# Altium PCB PCB1.PcbDoc
Units mm, origin at the board's own origin, x right, y up, seen from the top; angles counter-clockwise.
Board outline 68.1 x 57.9 mm, 2 copper layers (Top Layer, Bottom Layer); 88 components, 62 nets, 316 pads, 94 vias.
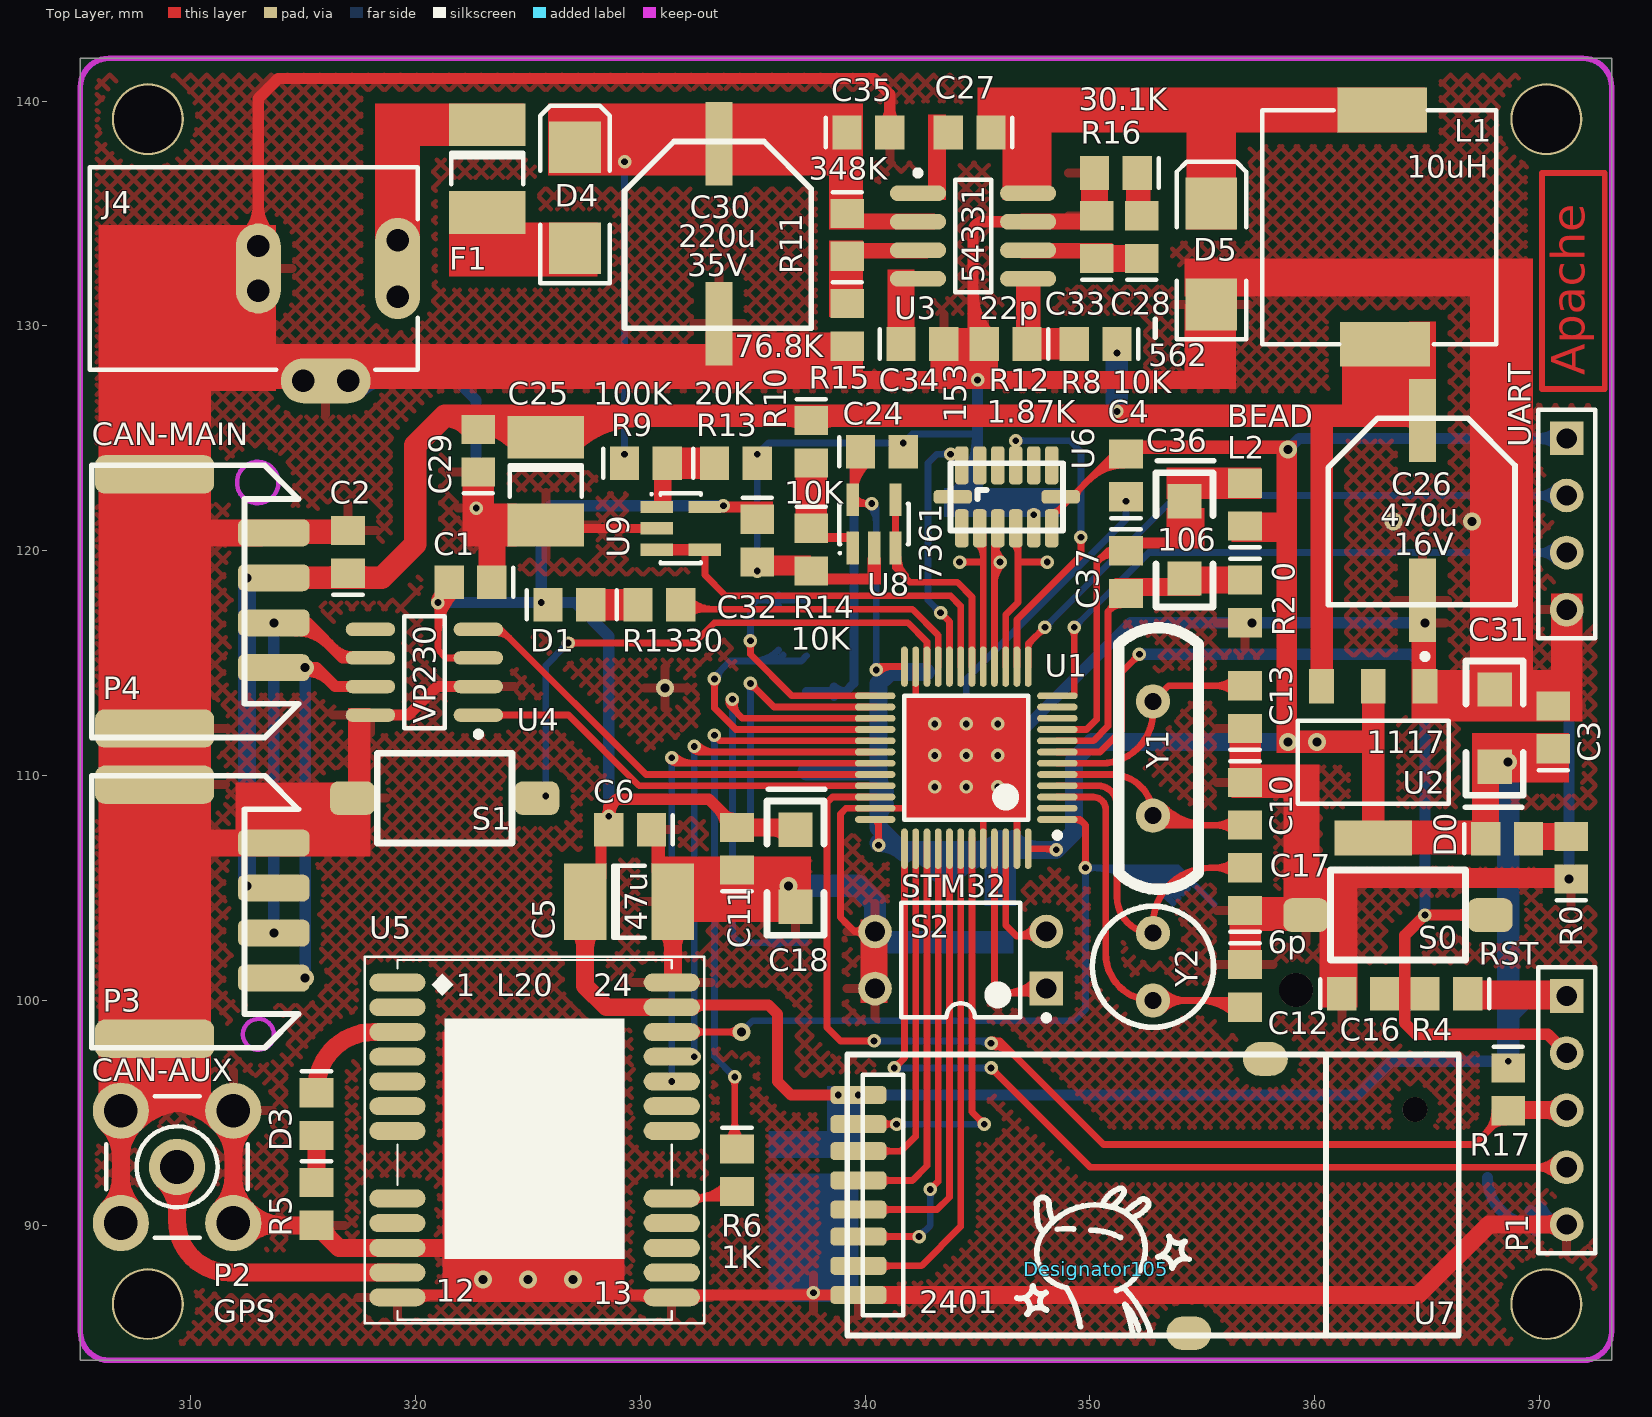
[diagram p0: Top Layer view]
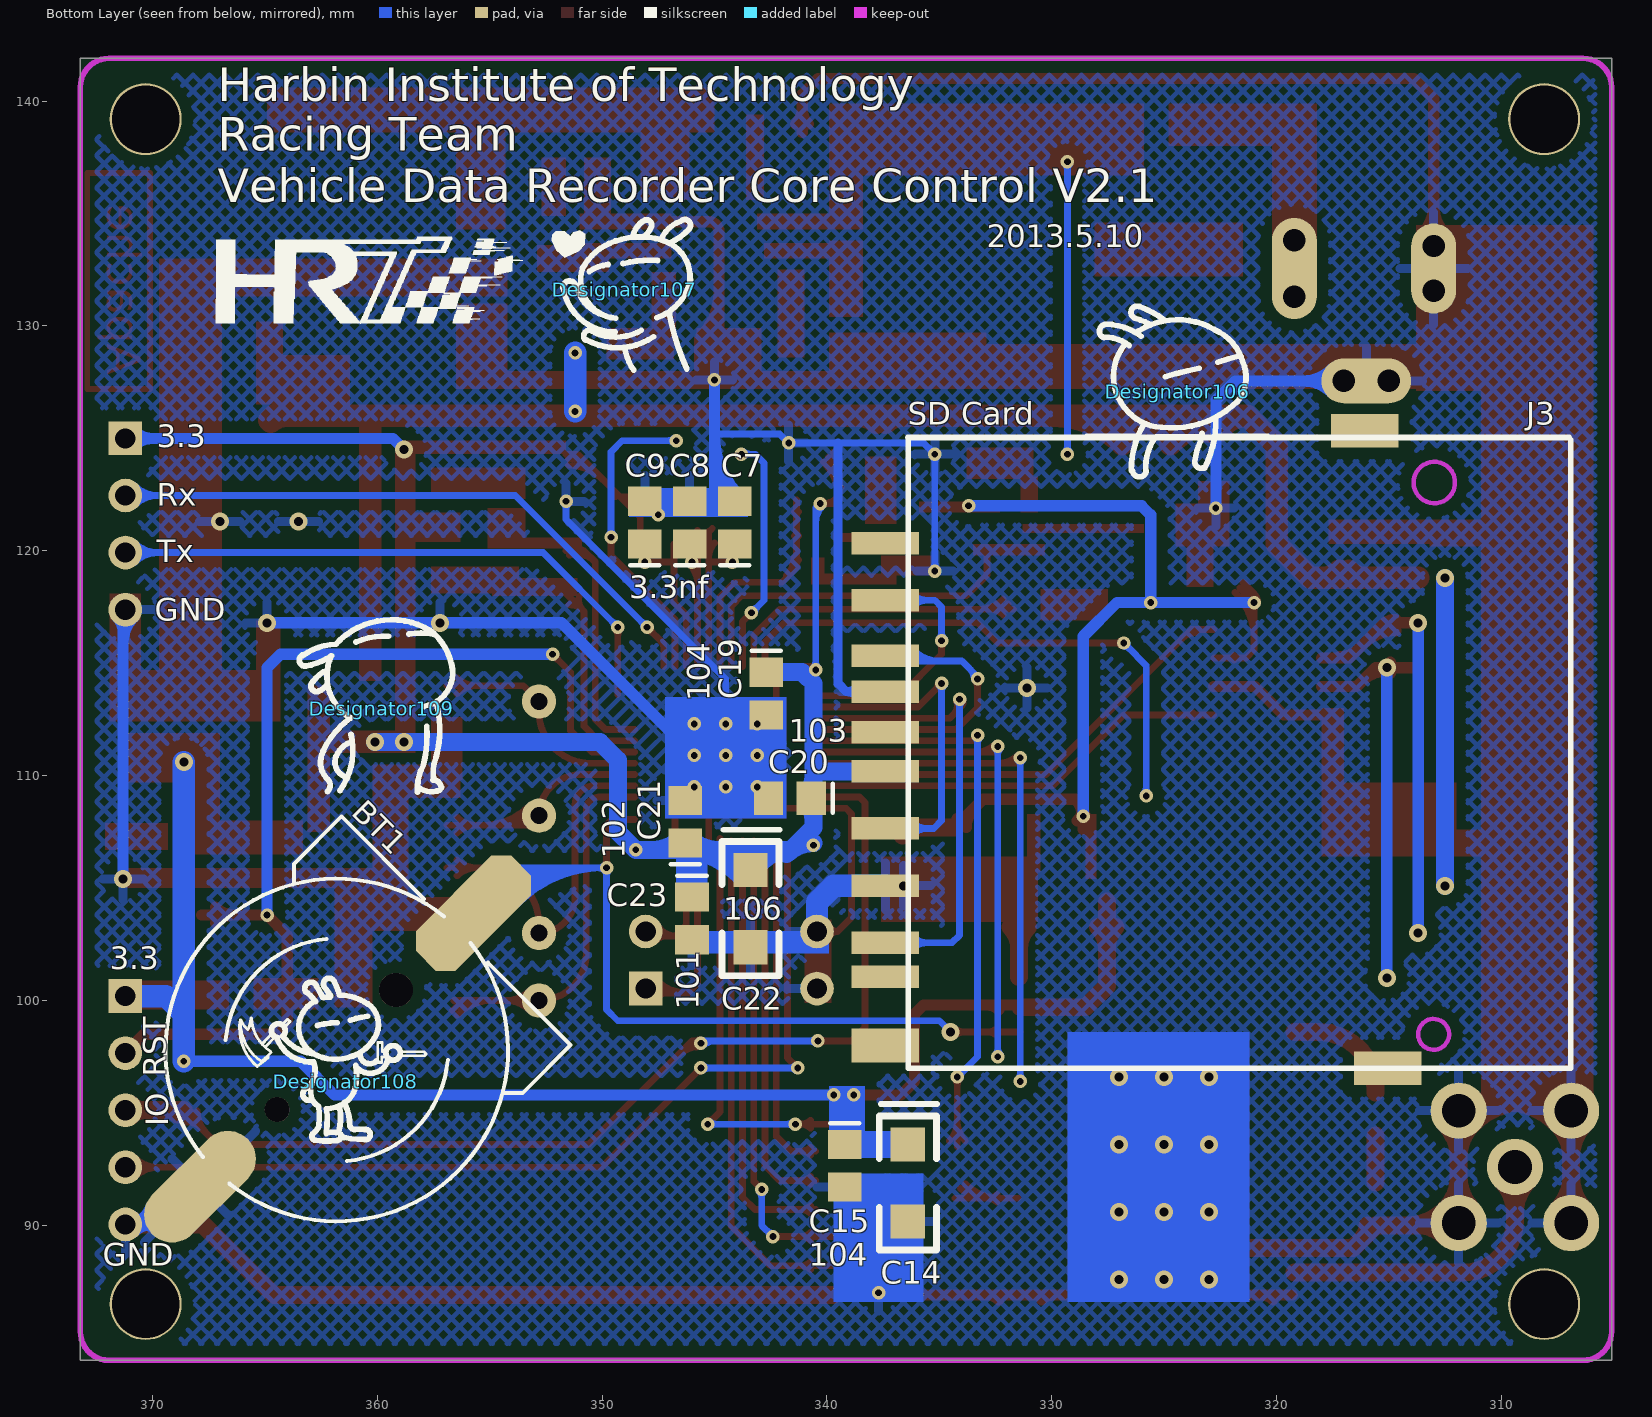
[diagram p1: Bottom Layer view, seen from below]

## Layer stack, top to bottom
Top Layer: signal copper 0.0356
Dielectric: dielectric 0.32, FR-4, Dk 4.8
Bottom Layer: signal copper 0.0356

## Board outline
305.1,141.9 373.2,141.9 373.2,84 305.1,84

## Design rules (kind name [scope] priority, off if disabled: settings)
Clearance Clearance_1 [(InPolygon)] p1: gap=0.5
Clearance [All] p2: gap=0.2
PolygonConnect [All] p1: connectstyle=Relief reliefconductorwidth=0.4 reliefentries=4 polygonreliefangle="90 Angle"
RoutingVias [All] p1: holewidth=0.711 width=1.27 viastyle="Through Hole" minholewidth=0.711 minwidth=1.27 maxholewidth=0.711 maxwidth=1.27
SilkscreenOverComponentPads [All] p1: minsilkscreentomaskgap=0.254
SolderMaskExpansion [All] p1: expansion=0.102
Width [All] p1: maxlimit=2 minlimit=0.254 preferedwidth=0.4
27 further rules are at their usual default settings.

## Classes and differential pairs
component class Sheet1: BT1 C1 C2 C3 C4 C5 C6 C7 C8 C9 C10 C11 C12 C13 C14 C15 C16 C17 C18 C19 C20 C21 C22 C23 C24 C25 C26 C27 C28 C29 C30 C31 C32 C33 C34 C35 C36 C37 D0 D1 D3 D4 D5 F1 J3 J4 L1 L2 P1 P2 P3 P4 R0 R1 R2 R4 R5 R6 R8 R9 R10 R11 R12 R13 R14 R15 R16 R17 S0 S1 S2 U1 U2 U3 U4 U5 U6 U7 U8 U9 UART Y1 Y2

## Components (designator, comment, footprint, x,y, rotation, side; value= is the part's Value field where it differs from the comment)
BT1 "Battery" LI1220_1 361.8,97.8 r225 bottom
C1 "Cap" C0805 323.4,118.6 r180 top
C2 "Cap" C0805 317,119 r90 top
C3 "Cap" C0805 370.6,111.2 r90 top
C4 "Cap" C0805 351.6,122.4 r90 top
C5 "Cap Pol2" 1812 329.5,104.4 r0 top
C6 "Cap" C0805 330.5,107.6 r180 top
C7 "Cap" C0805 344.1,120.3 r90 bottom
C8 "Cap" C0805 346.1,120.3 r90 bottom
C9 "Cap" C0805 348.1,120.3 r90 bottom
C10 "Cap" C0805 356.9,109.7 r270 top
C11 "Cap" C0805 334.3,105.8 r90 top
C12 "Cap" C0805 356.9,101.6 r270 top
C13 "Cap" C0805 356.9,112.1 r90 top
C14 "Cap Pol2" 1206 336.4,93.6 r270 bottom
C15 "Cap" C0805 339.2,93.6 r270 bottom
C16 "Cap" C0805 361.2,100.3 r0 top
C17 "Cap" C0805 356.9,104 r90 top
C18 "Cap Pol2" 1206 336.9,107.6 r270 top
C19 "Cap" C0805 342.7,114.6 r270 bottom
C20 "Cap" C0805 340.7,109 r0 bottom
C21 "Cap" C0805 346.3,107 r90 bottom
C22 "Cap Pol2" 1206 343.4,105.8 r270 bottom
C23 "Cap" C0805 346,104.6 r270 bottom
C24 "Cap" C0805 339.8,124.4 r0 top
C25 "Cap Pol2" 1812 325.8,123.1 r270 top
C26 "Cap Pol2" Cap8*8 364.8,125.2 r0 top
C27 "Cap" C0805 345.6,138.6 r180 top
C28 "Cap" C0805 352.3,133 r90 top
C29 "Cap" C0805 322.8,123.5 r90 top
C30 "Cap Pol1" Cap8*8 333.5,137.5 r0 top
C31 "Cap Pol2" 1206 368,110.4 r90 top
C32 "Cap" C0805 335.2,121.4 r270 top
C33 "Cap" C0805 350.3,133 r90 top
C34 "Cap" C0805 341.6,129.2 r0 top
C35 "Cap" C0805 339.2,138.6 r0 top
C36 "Cap Pol2" 1206 354.2,122.2 r270 top
C37 "Cap" C0805 351.6,120 r270 top
D0 "LED2" C0805 367.6,107.2 r0 top
D1 "LED2" C0805 325.9,117.6 r0 top
D3 "LED2" C0805 315.6,95.9 r270 top
D4 "Diode 1N4007" SMB 327.1,135.7 r90 top
D5 "B340A" SMB 355.4,133.2 r90 top
Designator105 "Comment" TUSIJI_14 350.287,88.064 r0 top
Designator106 "Comment" TUSIJI_3 324.4,127.102 r180 bottom
Designator107 "Comment" TUSIJI_8 348.985,131.638 r180 bottom
Designator108 "Comment" TUSIJI_23 361.4,96.4 r180 bottom
Designator109 "Comment" TUSIJI_16 359.8,113 r180 bottom
F1 "Fuse 1" 1812 323.2,137 r270 top
J3 "SD" SD_LOCK 337.4,117.8 r270 bottom locked
J4 "PWR2.5" KLD-0202 305.512,132.556 r0 top
L1 "Inductor Iron" l 363,139.6 r270 top
L2 "Inductor" C0805 356.9,121.1 r90 top
P1 "Jlink" HDR1X5 371.2,100.2 r270 top
P2 "SMB" SMB_V-RJ45 309.4,92.6 r0 top
P3 "Header 4" DuraClik*4 305.6,100 r270 top
P4 "Header 4" DuraClik*4 305.6,113.8 r270 top
R0 "Res2" C0805 371.4,105.4 r90 top
R1 "Res2" C0805 329.9,117.6 r0 top
R2 "Res2" C0805 356.9,118.7 r270 top
R4 "Res2" C0805 366.8,100.3 r180 top
R5 "Res2" C0805 315.6,91.9 r270 top
R6 "Res2" C0805 334.3,93.4 r270 top
R8 "Res2" C0805 351.2,129.2 r180 top
R9 "Res2" C0805 329.3,123.9 r0 top
R10 "Res2" C0805 337.6,125.8 r270 top
R11 "Res2" C0805 339.2,135 r270 top
R12 "Res2" C0805 347.2,129.2 r180 top
R13 "Res2" C0805 333.3,123.9 r0 top
R14 "Res2" C0805 337.6,121 r270 top
R15 "Res2" C0805 339.2,131 r270 top
R16 "Res2" C0805 352.1,136.8 r180 top
R17 "Res2" C0805 368.6,97 r270 top
S0 "SW-PB" button_SMD 359.6,103.8 r0 top
S1 "SW-PB" button_SMD 317.2,109 r0 top
S2 "SW DIP-2" DIP-4 344.25,101.8 r180 top
U1 "STM32F103C8T6" LQFP48_N 344.5,110.8 r180 top
U2 "REG1117-3.3" ZZ311 362.6,110.6 r180 top
U3 "TPS54331" SOIC8_M 344.8,134 r0 top
U4 "VP230" SOP8_N 320.4,114.6 r180 top
U5 "L20" L20 325.3,93.8 r0 top
U6 "MMA7361" "MMA7361 - duplicate" 343.8,120.9 r90 top
U7 "nRF24L01" "NRF24L01 PA" 339.2,97.6 r0 top
U8 "TLV2211" SOT-23-5 340.4,121.2 r0 top
U9 "TLV2211" SOT-23-5 331.8,121 r270 top
UART "Header 4" HDR1X4 371.2,125 r270 top
Y1 "8M" XTAL 352.8,113.3 r270 top
Y2 "32.768K" XTAL32 352.8,103 r270 top

## Footprints (in the part's own frame and the unit in brackets; to place one, negate y for a bottom-side part, rotate by r counter-clockwise, add the part's x,y. Pads: shape width x height; smd on the part's side, far side on the other; paste and mask are expansions set on the pad)
1206 [mil]
  rect 60x60 smd: 1(0,0) 2(135,0)
  silkscreen extent -71,-50 185,51
1812 [mm]
  rect 1.9x3.4 smd: 1(-1.95,0) 2(1.95,0)
  silkscreen extent -0.7,-1.6 0.7,1.6
button_SMD [mm]
  rrect50% 2x1.5 smd: 1(0,0) 2(8.2,0)
  silkscreen extent 1.1,-2 7.1,2
C0805 [mm]
  rect 1.3x1.5 smd: 1(0,0) 2(1.9,0)
  silkscreen extent -0.95,-0.65 -0.95,0.65
Cap8*8 [mm]
  rect 1.2x3.7 smd: 1(0,0.6) 2(0,-7.4)
  silkscreen extent -4.2,-7.6 4.1,0.7
DIP-4 [mm] "DIP; 4 Leads; Row Spacing 7.62 mm; Pitch 2.54 mm"
  rect 1.5x1.5 hole 0.9: 1(-3.81,1.27)
  round 1.5 hole 0.9: 2(-3.81,-1.27) 3(3.81,-1.27) 4(3.81,1.27)
  silkscreen extent -3.94,-2.55 2.65,2.69, body extent -3.15,-2.5 3.15,2.5, height 5.6
DuraClik*4 [mm]
  rrect50% 1.7x5.3 smd: 0(-9.6,2.8) 0(1.7,2.8)
  rrect50% 1.2x3.2 smd: 1(-7,8.1) 2(-5,8.1) 3(-3,8.1) 4(-1,8.1)
  silkscreen extent -10,0 2.1,9.2
HDR1X4 [mm] "Connector; Header; 4 Position"
  rect 1.5x1.5 hole 0.9: 1(0,0)
  round 1.5 hole 0.9: 2(2.54,0) 3(5.08,0) 4(7.62,0)
  silkscreen extent -1.27,-1.27 8.89,1.27
HDR1X5 [mm] "Connector; Header; 5 Position"
  rect 1.5x1.5 hole 0.9: 1(0,0)
  round 1.5 hole 0.9: 2(2.54,0) 3(5.08,0) 4(7.62,0) 5(10.16,0)
  silkscreen extent -1.27,-1.27 11.43,1.27
KLD-0202 [mm] "DC Power Jack, 2.5mm, KLD Series, PCB Mount"
  oval 2x4.5 all layers, no hole: 1(13.7,0)
  round 1.5 hole 1: 1A(13.7,-1.25) 1B(13.7,1.25) 2A(7.5,-1) 2B(7.5,1) 3A(9.5,-5) 3B(11.5,-5)
  oval 2x4 all layers, no hole: 2(7.5,0)
  oval 4x2 all layers, no hole: 3(10.5,-5)
  silkscreen extent 0,-4.5 14.6,4.5
l [mm]
  rect 2x4 smd: 1(0,0) 2(10.414,0.127)
  silkscreen extent 0,-5.33 10.41,5.08
L20 [mm]
  oval 2.5x0.8 smd: 1(-6.1,7) 2(-6.1,5.9) 3(-6.1,4.8) 4(-6.1,3.7) 5(-6.1,2.6) 6(-6.1,1.5) 7(-6.1,0.4) 8(-6.1,-2.6) 9(-6.1,-3.7) 10(-6.1,-4.8) 11(-6.1,-5.9) 12(-6.1,-7) 13(6.1,-7) 14(6.1,-5.9) 15(6.1,-4.8) 16(6.1,-3.7) 17(6.1,-2.6) 18(6.1,0.4) 19(6.1,1.5) 20(6.1,2.6) 21(6.1,3.7) 22(6.1,4.8) 23(6.1,5.9) 24(6.1,7)
  silkscreen extent -7.55,-8.15 7.55,8.15
LI1220_1 [mm]
  round 1.5 hole 1.5 unplated: 0(-0.025,3.75)
  round 1.1 hole 1.1 unplated: 0(0,-3.75)
  oct 2.5x6 smd: 1(0,8.6)
  oval 2.5x6 smd: 2(0,-8.6)
  silkscreen extent -7.62,-7.57 7.62,7.57
LQFP48_N [mm] "Thin QFP, 48-Leads, Body 7x7mm, Pitch 0.5mm, IPC Medium Density"
  oval 1.8x0.3 smd: 1(-4.05,2.75) 2(-4.05,2.25) 3(-4.05,1.75) 4(-4.05,1.25) 5(-4.05,0.75) 6(-4.05,0.25) 7(-4.05,-0.25) 8(-4.05,-0.75) 9(-4.05,-1.25) 10(-4.05,-1.75) 11(-4.05,-2.25) 12(-4.05,-2.75) 25(4.05,-2.75) 26(4.05,-2.25) 27(4.05,-1.75) 28(4.05,-1.25) 29(4.05,-0.75) 30(4.05,-0.25) 31(4.05,0.25) 32(4.05,0.75) 33(4.05,1.25) 34(4.05,1.75) 35(4.05,2.25) 36(4.05,2.75)
  oval 0.3x1.8 smd: 13(-2.75,-4.05) 14(-2.25,-4.05) 15(-1.75,-4.05) 16(-1.25,-4.05) 17(-0.75,-4.05) 18(-0.25,-4.05) 19(0.25,-4.05) 20(0.75,-4.05) 21(1.25,-4.05) 22(1.75,-4.05) 23(2.25,-4.05) 24(2.75,-4.05) 37(2.75,4.05) 38(2.25,4.05) 39(1.75,4.05) 40(1.25,4.05) 41(0.75,4.05) 42(0.25,4.05) 43(-0.25,4.05) 44(-0.75,4.05) 45(-1.25,4.05) 46(-1.75,4.05) 47(-2.25,4.05) 48(-2.75,4.05)
  silkscreen extent -4.18,-2.75 2.75,3.57, body extent -3.5,-3.5 3.5,3.5, height 1.6
"MMA7361 - duplicate" [mm]
  rrect50% 1.7x0.6 smd: 1(0.1,-0.5) 2(0.1,-1.3) 3(0.1,-2.1) 4(0.1,-2.9) 5(0.1,-3.7) 6(0.1,-4.5) 8(2.9,-4.5) 9(2.9,-3.7) 10(2.9,-2.9) 11(2.9,-2.1) 12(2.9,-1.3) 13(2.9,-0.5)
  rrect50% 0.6x1.7 smd: 7(1.5,-4.9) 14(1.5,-0.1)
  silkscreen extent 0,-5 3,0
"NRF24L01 PA" [mm]
  oval 2x1.5 smd: 0(18.6,-0.2) 1(15.2,-12.4)
  rrect50% 2.5x0.8 smd: 1(0.5,-1.8) 2(0.5,-3.1) 3(0.5,-4.3) 4(0.5,-5.6) 5(0.5,-6.9) 6(0.5,-8.1) 7(0.5,-9.4) 8(0.5,-10.7)
  silkscreen extent 0,-12.5 27.2,0
SD_LOCK [mm]
  rect 1x3 smd: 1(0,0) 2(2.464,0.001) 3(4.064,0) 4(7.608,0.001) 5(10.148,0.001) 6(12.688,0.001) 7(15.228,0.001) 8(16.752,0.001) 9(-2.54,0) 11(5.864,0.001)
  rect 1.5x3 smd: 10(-7.536,21.316) 10(19.8,0.001) 10(20.816,22.353)
  Keep-Out Layer circle w0.2: c19.304,24.384 r0.687
  Keep-Out Layer circle w0.2: c-5.236,24.416 r0.922
  silkscreen extent -7.24,1 20.82,30.48
SMB [mm] "DO-214-AA/SMB; 2 C-Bend Leads; Body 5.3 x 3.6 mm, inc. leads (LxW)"
  rect 2.3x2.3 smd: 1(-2.25,0) 2(2.25,0)
  silkscreen extent -3.8,-1.55 4.1,1.55
SMB_V-RJ45 [mm] "Connector; SMB Straight"
  round 2.5 hole 1.5: 1(0,0) 2(-2.5,-2.5) 2(-2.5,2.5) 2(2.5,-2.5) 2(2.5,2.5)
  silkscreen extent -3.15,-3.15 3.15,3.15
SOIC8_M [mm]
  oval 2.5x0.7 smd: 1(-2.45,1.905) 2(-2.45,0.635) 3(-2.45,-0.635) 4(-2.45,-1.905) 5(2.45,-1.905) 6(2.45,-0.635) 7(2.45,0.635) 8(2.45,1.905)
  silkscreen extent -2.57,-2.5 0.8,2.93, body extent -2,-2.5 2,2.5, height 1.75
SOP8_N [mm] "SOIC, 8-Leads, Body 4.9x3.9mm, Pitch 1.27mm, IPC Medium Density"
  oval 2.2x0.6 smd: 1(-2.4,1.905) 2(-2.4,0.635) 3(-2.4,-0.635) 4(-2.4,-1.905) 5(2.4,-1.905) 6(2.4,-0.635) 7(2.4,0.635) 8(2.4,1.905)
  silkscreen extent -2.53,-2.5 0.9,2.88, body extent -2,-2.5 2,2.5, height 1.75
SOT-23-5 [mm] "SOT-23/SC-74A; 5 Leads; Body 3 x 3.1 mm, inc. leads (LxW max)"
  rect 0.55x1.45 smd: 1(-0.95,-1.075) 2(0,-1.075) 3(0.95,-1.075) 4(0.95,1.075) 5(-0.95,1.075)
  silkscreen extent -1.57,-1.35 1.55,0.9
TUSIJI_3 [mm] "TSJ"
  silkscreen extent -4.04,-3.81 4.01,3.78
TUSIJI_8 [mm] "TSJ"
  silkscreen extent -3.25,-3.61 2.92,3.1
TUSIJI_14 [mm] "TSJ"
  silkscreen extent -3.53,-2.77 4.11,3.59
TUSIJI_16 [mm] "TSJ"
  silkscreen extent -3.66,-3.73 3.16,3.93
TUSIJI_23 [mm] "TSJ"
  silkscreen extent -4.72,-2.65 3.58,4.59
XTAL [mil]
  round 60 hole 30: 1(200,0) 2(0,0)
  silkscreen extent -129,-60 329,80
XTAL32 [mil]
  round 60 hole 30: 1(0,0) 2(118.11,0)
  silkscreen extent -47,-106 165,106
ZZ311 [mm] "SOT-223/SC-73; 4 Leads; Body 6.7 x 7.3 mm, inc. leads (LxW max)"
  rect 1.1x1.55 smd: 1(-2.3,-3.375) 2(0,-3.375) 3(2.3,-3.375)
  rect 3.45x1.55 smd: 4(0,3.375)
  silkscreen extent -3.35,-4.82 3.35,1.85

## Part data
BT1: "Multicell Battery"
C1 C2 C3 C4 C6 C7 C8 C9 C10 C11 C12 C13 C15 C16 C17 C19 C20 C21 C23 C24 C27 C28 C29 C32 C33 C34 C35 C37: "Capacitor"
C5 C14 C18 C22 C25 C26 C31 C36: "Polarized Capacitor (Axial)"
C30: "Polarized Capacitor (Radial)"
D0 D1 D3: "Typical RED, GREEN, YELLOW, AMBER GaAs LED"
D4: "1 Amp General Purpose Rectifier"
D5: library part "Diode 11DQ03", "Schottky Rectifier"
F1: "Fuse"
J3: "Full-size SD Memory Card"
J4: "Low Voltage Power Supply Connector"
L1: "Magnetic-Core Inductor"
P1: library part "Header 5", "Header, 5-Pin"
P2: "SMB Straight Connector"
P3 P4 UART: "Header, 4-Pin"
R0 R1 R2 R4 R5 R6 R8 R9 R10 R11 R12 R13 R14 R15 R16 R17: "Resistor"
S0 S1: "Switch"
S2: "DIP Switch, 2 Position, SPST"
U1: "STM32 ARM-based 32-bit MCU with 64 Kbytes Flash, 48-pin LQFP, Industrial Temperature"
U2: "800mA and 1A Low Dropout Positive Regulator 2.85V, 3.3V, 5V, and Adjustable"
U3: "3A,28VINPUT, STEPDOWNSWIFT?DC/DCCONVERTERWITHECO-MODE?"
U4: "3.3-VCANTRANSCEIVERS"
U7: "nRF24L01+PA+LNA"
Y1 Y2: library part XTAL, "Crystal Oscillator"

## Free pads (board coordinates)
  round 3.2 hole 3: 0(370.3,139.2) 1(370.3,86.5) 2(308.1,86.5) 3(308.1,139.2)

## Via types
v1: diameter 0.6, hole 0.3, Top Layer to Bottom Layer, 64 vias
v2: diameter 0.8, hole 0.4, Top Layer to Bottom Layer, 30 vias

## Nets (pads, with @x,y where several pads share a name; then routed paths per layer and width w, separated by ;. In a path a pad name is that pad's centre, name@x,y a point inside that pad or via, vN(x,y) a via of type N, cw(c..) or ccw(c..) an arc to the next point about the centre after c; other vN are vias at no path point)
ADC12_IN5: C9.1 U1.15 U6.4 | length 8.1
  Top Layer w0.3: U1.15 346.25,117.15 346.8,117.7 U6.4@346.8,120.3 ; U6.4@346.594,120.344 cw(c346.096,119.846) 346.8,119.846 ; 346.8,119.5 v1(348.1,119.5) ; v1@347.994,119.394 ccw(c347.738,119.138) 347.738,119.5 ccw(c347.738,119.862) v1@347.994,119.606
ADC12_IN6: C8.1 U1.16 U6.3 | length 9.4
  Top Layer w0.3: U1.16 U6.3@345.75,120.9 ; 345.75,118.534 cw(c346.966,118.534) v1@346.106,119.394 ; 345.75,119.259 cw(c346.241,119.259) v1@345.894,119.606 ; 345.75,119.726 cw(c346.624,119.726) U6.3@346.006,120.344 ; 345.75,119.741 ccw(c346.241,119.741) v1@345.894,119.394 ; U6.3@345.75,120.466 ccw(c346.966,120.466) v1@346.106,119.606
  other v1: 346,119.5
ADC12_IN7: C7.1 U1.17 U6.2 | length 8.3
  Top Layer w0.3: v1(344.2,119.5) 345.25,119.5 ; v1@344.306,119.394 cw(c344.562,119.138) 344.562,119.5 cw(c344.562,119.862) v1@344.306,119.606 ; U6.2@344.994,120.344 cw(c344.376,119.726) 345.25,119.726 ; U6.2 345.25,120.85 345.25,119.5 ; U1.17@345.25,115.1 345.25,119.5
ADC12_IN8: U1.18 U8.3 U8.4 | length 12.8
  Top Layer w0.3: U8.3@341.262,120.663 ccw(c341.048,120.877) 341.35,120.877 ccw(c341.652,120.877) U8.3@341.438,120.663 ; U8.4@341.262,121.737 cw(c341.048,121.523) 341.35,121.523 cw(c341.652,121.523) U8.4@341.438,121.737 ; U8.4 341.35,119.25 342,118.6 344.1,118.6 344.75,117.95 U1.18 ; U8.3@341.475,119.675 ccw(c342.561,119.675) 341.793,118.907 ; 341.35,119.373 cw(c341.652,119.373) 341.438,119.587 ccw(c341.652,119.373) 341.35,119.373 ; 341.35,119.373 ccw(c341.048,119.373) 341.262,119.587 cw(c341.048,119.373) 341.35,119.373
ADC12_IN9: U1.19 U9.3 U9.4 | length 16.2
  Top Layer w0.3: U9.4@332.787,119.962 cw(c332.573,119.748) 332.875,119.748 cw(c333.177,119.748) U9.4@332.963,119.962 ; U9.4 332.875,118.925 333.8,118 343.8,118 344.25,117.55 U1.19
ADC_5V: R10.2 R14.1 U8.1
ADC_12V: R9.2 R13.1 U9.1
ADDRESS1: S2.2 U1.46 | length 8.1
  Top Layer w0.3: U1.46@346.25,107.2 346.25,103.35 346.73,102.87 ; 347.094,102.87 cw(c347.094,102.104) S2.2@347.636,102.646 ; 347.229,102.87 ccw(c347.229,103.511) S2.2@347.795,103.211 ; S2.2@347.53,103.351 cw(c346.73,103.775) 346.73,102.87 ; S2.2@348.06,102.87 346.73,102.87
ADDRESS2: S2.1 U1.45 | length 12.3
  Top Layer w0.3: U1.45@345.75,107.3 345.75,100.75 346.17,100.33 ; 346.879,100.33 ccw(c346.879,101.675) S2.1@347.845,100.739 ; 347.094,100.33 cw(c347.094,99.564) S2.1@347.636,100.106 ; S2.1@347.629,100.948 cw(c346.17,102.362) 346.17,100.33 ; S2.1@348.06,100.33 346.17,100.33
AGND: C36.2 C37.2 R2.1 U1.8 | length 10.1
  Top Layer w0.3: U1.8 350.15,111.55 350.8,112.2 350.8,117.3 C37.2 ; C37.2@351.017,117.971 cw(c350.395,117.805) 350.85,117.35 cw(c351.455,116.745) C37.2@351.484,117.6
CAN_H: P3.4 P4.4 U4.7 | length 21
  Top Layer w0.5: P4.4 v2(315.1,114.8) 315.6,114.8 316.435,113.965 U4.7 ; P4.4@314.947,114.552 cw(c315.545,113.955) 315.545,114.8 cw(c315.545,115.645) P4.4@314.947,115.047 ; P4.4@315.1,114.65 cw(c315.1,113.081) 316.21,114.19
  Bottom Layer w0.5: v2(315.1,101) v2(315.1,114.8)
CAN_L: P3.3 P4.3 U4.6 | length 21.9
  Top Layer w0.5: v2(313.7,116.8) 315.2,116.8 316.765,115.235 U4.6 ; P4.3@314.7,116.45 cw(c314.7,114.398) 316.151,115.849 ; P4.3@314.7,116.95 cw(c314.7,116.105) P4.3@315.297,116.703 ; 316.372,115.628 ccw(c317.2,116.456) U4.6@317.2,115.285
  Bottom Layer w0.5: v2(313.7,103) v2(313.7,116.8)
G_SELECT: U1.14 U6.10 | length 15.6
  Top Layer w0.3: U1.14 346.75,116.943 349.6,119.793 v1(349.6,120.6) ; v1@349.494,120.494 cw(c349.238,120.238) 349.6,120.238 cw(c349.962,120.238) v1@349.706,120.494
  Bottom Layer w0.3: v1@346.7,124.8 v1(346.7,124.9) 349.1,124.9 349.6,124.4 v1(349.6,120.6) ; v1@346.806,124.794 cw(c347.062,124.538) 347.062,124.9 cw(c347.062,125.262) v1@346.806,125.006 ; v1@349.494,120.706 ccw(c349.238,120.962) 349.6,120.962 ccw(c349.962,120.962) v1@349.706,120.706
GND: BT1.2 C1.1 C2.2 C3.2 C4.1 C5.2 C6.1 C7.2 C8.2 C9.2 C10.1 C11.1 C12.1 C13.1 C14.2 C15.2 C16.1 C17.1 C18.2 C19.2 C20.2 C21.2 C22.2 C23.2 C24.2 C25.2 C26.2 C29.1 C30.2 C31.2 C32.2 C33.2 C34.2 C35.2 D5.1 J3.3 J3.6 J4.2 J4.2A J4.2B J4.3 J4.3A J4.3B P1.5 P2.2 P3.0 P3.1 P4.0 P4.1 R0.1 R2.2 R5.2 R12.2 R13.2 R14.2 R15.2 R16.2 S0.1 S1.1 S2.3 S2.4 U1.23 U1.35 U1.44 U1.47 U2.1 U3.7 U4.2 U4.8 U5.10 U5.12 U5.13 U5.24 U6.5 U7.8 U8.2 U9.2 UART.4 | length 309.1
  Top Layer w0.3: S2.3@339.889,102.834 ccw(c339.53,102.68) 339.53,103.07 ; S2.3@339.889,103.306 cw(c339.53,103.46) 339.53,103.07 ; S2.3 339.53,103.07 ; 342.25,113.15 U1.23 ; 342.85,108.55 U1.35 339.15,108.55 338.9,108.3 338.9,103.7 339.53,103.07 ; U1.44 345.25,108.95 ; U1.47 346.75,108.45
  Top Layer w0.5: J4.2@312.482,134.086 ccw(c311.201,135.367) 313.012,135.367 ccw(c314.823,135.367) J4.2@313.542,134.086 ; J4.2@312.658,133.91 ccw(c311.805,134.763) 313.012,134.763 ccw(c314.219,134.763) J4.2@313.366,133.91 ; J4.2B 313.012,140.112 313.9,141 340.4,141 341.1,140.3 C35.2 ; U4.8 319.695,112.695 320.965,113.965 U4.2 ; U5.12@319.3,86.9 U7.8 ; U5.12@320.156,86.694 cw(c320.654,86.196) 320.654,86.9 ; 329.946,86.9 cw(c329.946,86.196) U5.13@330.444,86.694 ; U5.13@332.356,86.694 cw(c332.854,86.196) 332.854,86.9 ; 337.338,86.9 ccw(c337.338,87.362) v1@337.665,87.035 ; v1@337.735,87.035 ccw(c338.062,87.362) 338.062,86.9 ; C35.2@340.817,138.983 ccw(c340.134,139.666) 341.1,139.666 ccw(c342.066,139.666) C35.2@341.383,138.983 ; 344.8,130.266 ccw(c346.266,130.266) R12.2@345.229,129.229 ; 344.8,131.473 ccw(c347.473,131.473) R12.2@345.583,129.583 ; R12.2 344.8,129.7 344.8,134.2 cw(c345.235,134.2) 345.235,134.635 U3.7
  Top Layer w0.8: P2.2@306.299,90.701 ccw(c304.848,92.152) 306.9,92.152 ccw(c308.952,92.152) P2.2@307.501,90.701 ; P2.2@306.299,94.499 cw(c304.848,93.048) 306.9,93.048 cw(c308.952,93.048) 307.501,94.499 cw(c309.918,92.082) 309.918,95.5 ; P2.2@306.7,90.5 306.9,90.7 306.9,95.5 311.9,95.5 311.9,90.3 312.2,90 R5.2 316.6,89 U5.10 321.9,89 ; 308.882,95.5 cw(c308.882,92.082) 311.299,94.499 cw(c309.848,93.048) 311.9,93.048 cw(c313.952,93.048) P2.2@312.501,94.499 ; P2.2@311.299,90.701 ccw(c309.848,92.152) 311.9,92.152 ccw(c313.952,92.152) 312.501,90.701 ccw(c314.194,92.394) 314.194,90 ; P2.2@312.501,89.499 cw(c313.711,88.289) 313.711,90 ; R5.2@315.95,90 ccw(c316.795,90) R5.2@316.197,89.403 ; C5.2@331.061,103.261 cw(c330.122,102.322) 331.45,102.322 cw(c332.778,102.322) C5.2@331.839,103.261 ; U5.24@331.45,101.05 C5.2 ; U7.8 364.6,86.9 367.74,90.04 P1.5 ; P1.5@370.953,89.793 ccw(c370.355,89.195) 370.355,90.04 ccw(c370.355,90.885) P1.5@370.953,90.287
  Bottom Layer w0.3: v1@335.094,119.206 ccw(c334.838,119.462) 335.2,119.462 ccw(c335.562,119.462) v1@335.306,119.206 ; v1@335.094,124.194 cw(c334.838,123.938) 335.2,123.938 cw(c335.562,123.938) v1@335.306,124.194 ; v1(335.2,119.1) v1(335.2,124.3) 335.7,124.8 339.5,124.8 v1(341.7,124.8) 342.1,125.2 345,125.2 ; v1@335.2,124.45 ccw(c335.2,124.812) 335.456,124.556 ccw(c335.712,124.3) v1@335.35,124.3 ; v1@341.594,124.694 ccw(c341.338,124.438) 341.338,124.8 ccw(c341.338,125.162) v1@341.594,124.906 ; v1@344.394,112.406 ccw(c344.138,112.662) 344.5,112.662 ccw(c344.862,112.662) v1@344.606,112.406 ; v1(344.5,112.3) 344.5,114.3 351.6,121.4 v1(351.6,122.2) ; v1@351.494,122.094 cw(c351.238,121.838) 351.6,121.838 cw(c351.962,121.838) v1@351.706,122.094
  Bottom Layer w0.4: J3.3 339.136,113.736 339.5,114.1 339.5,124.8 ; J3.3@338.612,113.524 cw(c339.124,113.012) 339.124,113.736 cw(c339.124,114.46) J3.3@338.612,113.948
  Bottom Layer w0.5: J4.3B 321.844,127.556 322.7,126.7 v1(322.7,121.9) ; J4.3@317.366,127.202 cw(c318.219,126.349) 318.219,127.556 cw(c318.219,128.763) J4.3@317.366,127.91 ; J4.3@317.542,127.026 cw(c318.823,125.745) 318.823,127.556 cw(c318.823,129.367) J4.3@317.542,128.086 ; C7.2@343.917,122.483 ccw(c341.303,125.097) 345,125.097 ; C7.2@344.271,122.129 ccw(c342.51,123.89) 345,123.89 ; C7.2@344.624,121.776 ccw(c343.717,122.683) 345,122.683 ; 345,122.3 345,125.2 v1(345,127.6) ; v1(345.9,110.9) 351.8,116.8 v2(357.2,116.8) v2@364.7,116.8 ; BT1.2@367.681,92.119 ccw(c369.76,92.119) 369.76,90.04 P1.5 cw(c371.2,91.263) BT1.2@370.055,90.833 ; BT1.2@369.587,90.657 ccw(c370.478,90.992) P1.5@370.478,90.04 ; BT1.2@369.826,89.774 cw(c370.467,89.133) P1.5@370.467,90.04 ; P1.5@370.846,89.686 ccw(c369.993,88.833) 369.993,90.04 ccw(c369.993,91.247) P1.5@370.846,90.394 ; UART.4@370.846,117.026 cw(c369.751,115.931) 371.3,115.931 ; v2(371.3,105.4) UART.4@371.3,117.28 ; 371.3,116.414 cw(c372.166,116.414) UART.4@371.554,117.026
  Bottom Layer w1: J3.6 339.688,105.112 340.44,104.36 S2.3
  other v1: 337.7,87 343.1,109.5 344.5,109.5 345.9,109.5 343.1,110.9 344.5,110.9 343.1,112.3 345.9,112.3 347.5,121.6
  other v2: 323,87.6 325,87.6 327,87.6 323,90.6 325,90.6 327,90.6 323,93.6 325,93.6 327,93.6 323,96.6 325,96.6 327,96.6 336.6,105.1 331.1,113.9 364.9,116.8 363.5,121.3 367,121.3
GPS_EN: R6.1 U1.29 | length 29.5
  Top Layer w0.3: v1(333.3,111.8) 333.55,111.55 U1.29 ; R6.1@333.846,93.754 ccw(c332.993,94.607) 334.2,94.607 ccw(c335.407,94.607) R6.1@334.554,93.754 ; v1@334.094,96.494 cw(c333.838,96.238) 334.2,96.238 cw(c334.562,96.238) v1@334.306,96.494 ; R6.1@334.2,93.5 v1(334.2,96.6)
  Bottom Layer w0.3: v1@333.194,111.694 cw(c332.938,111.438) 333.3,111.438 cw(c333.662,111.438) v1@333.406,111.694 ; v1(333.3,111.8) 333.3,97.5 v1(334.2,96.6) ; v1@334.05,96.6 ccw(c333.688,96.6) 333.944,96.856 ccw(c334.2,97.112) v1@334.2,96.75
KEY1: S1.2 U1.22 | length 26.5
  Top Layer w0.3: v1(326.8,115.9) 332.4,115.9 333.3,116.8 341.9,116.8 342.75,115.95 U1.22 ; v1@326.906,115.794 cw(c327.162,115.538) 327.162,115.9 cw(c327.162,116.262) v1@326.906,116.006
  Bottom Layer w0.3: v1@325.694,109.206 ccw(c325.438,109.462) 325.8,109.462 ccw(c326.162,109.462) v1@325.906,109.206 ; v1(325.8,109.1) 325.8,114.9 v1@326.636,115.736 ; v1@326.65,115.9 cw(c326.288,115.9) 326.544,115.644 cw(c326.8,115.388) v1@326.8,115.75
LED1: R1.2 U1.21 | length 16
  Top Layer w0.3: R1.2@331.7,117.4 342.1,117.4 343.25,116.25 U1.21 ; R1.2@331.941,117.641 ccw(c332.524,118.224) 332.524,117.4 ; R1.2@332.154,117.146 cw(c332.766,116.534) 332.766,117.4 ; R1.2@332.154,117.854 ccw(c333.249,118.949) 333.249,117.4
NetC10_2: C10.2 U1.5 Y1.1 | length 16.8
  Top Layer w0.3: U1.5 350.75,110.05 350.97,110.05 cw(c350.97,108.22) Y1.1 ; Y1.1@352.58,108.22 Y1.1 ; Y1.1@352.808,108.228 ccw(c353.843,109.263) 353.843,107.8 ; Y1.1@353.021,108.441 ccw(c354.567,109.987) 354.567,107.8 ; Y1.1@353.233,108.653 ccw(c355.291,110.711) 355.291,107.8 ; C10.2@356.446,107.446 ccw(c355.593,106.593) 355.593,107.8 ccw(c355.593,109.007) C10.2@356.446,108.154 ; C10.2 353.22,107.8 Y1.1
NetC12_2: C12.2 U1.3 Y2.2 | length 21.2
  Top Layer w0.3: U1.3 350.15,109.05 cw(c350.15,108.5) 350.7,108.5 350.7,102.1 ccw(c352.8,102.1) Y2.2 C12.2@356.6,100 ; Y2.2@353.233,99.567 cw(c354.278,98.523) 354.278,100 cw(c354.278,101.478) Y2.2@353.233,100.433 ; 354.869,100 cw(c354.869,97.769) C12.2@356.446,99.346 ; 355.593,100 cw(c355.593,98.493) C12.2@356.659,99.559
NetC13_2: C13.2 U1.6 Y1.2 | length 12.3
  Top Layer w0.3: U1.6 350.512,110.55 ccw(c350.512,112.838) 352.8,112.838 Y1.2 353.5,114 C13.2 ; C13.2@356.446,113.646 ccw(c355.593,112.793) 355.593,114 ccw(c355.593,115.207) C13.2@356.446,114.354
NetC17_2: C17.2 U1.4 Y2.1 | length 17.6
  Top Layer w0.3: U1.4 350.357,109.55 cw(c350.357,108.707) 351.2,108.707 351.2,104.6 ccw(c352.8,104.6) Y2.1 352.8,103.36 cw(c355.34,103.36) 355.34,105.9 C17.2 ; C17.2@356.446,105.546 ccw(c355.593,104.693) 355.593,105.9 ccw(c355.593,107.107) C17.2@356.446,106.254
NetC27_1: C27.1 D5.2 L1.1 U3.8
NetC27_2: C27.2 U3.1
NetC28_1: C28.1 C33.1 U3.6
NetC28_2: C28.2 R16.1
NetC34_1: C34.1 U3.4
NetC36_1: C36.1 C37.1 L2.2 U1.9 | length 13.2
  Top Layer w0.3: U1.9 349.85,112.05 350.3,112.5 350.3,119.5 350.8,120 ; 350.312,119.512 cw(c351.131,118.693) C37.1@351.446,119.808 ; 350.674,119.874 cw(c351.29,119.257) C37.1@351.527,120.096 ; C37.1@351.027,119.838 ccw(c350.8,119.76) 350.8,120 ; C37.1@351.027,120.162 cw(c350.8,120.24) 350.8,120 ; C37.1 350.8,120
NetD0_2: D0.2 R0.2
NetD1_2: D1.2 R1.1
NetD3_1: D3.1 U5.3 | length 5.4
  Top Layer w0.8: D3.1 D3.1@315.6,96.06 ; D3.1@315.6,96.26 D3.1@315.6,96.06 ; U5.3 318.14,98.6 ccw(c318.14,96.06) D3.1@315.6,96.06
NetD3_2: D3.2 R5.1 | length 2.1
  Top Layer w0.8: R5.1 D3.2
NetD4_1: D4.1 F1.2
NetF1_1: F1.1 J4.1 J4.1A J4.1B
NetP2_1: P2.1 U5.11 | length 20.4
  Top Layer w0.8: P2.1@308.799,91.999 cw(c307.348,90.548) 309.4,90.548 cw(c311.452,90.548) P2.1@310.001,91.999 ; P2.1 309.4,90.203 ; U5.11 311.703,87.9 ; 309.4,90.203 ccw(c311.703,90.203) 311.703,87.9 ; 309.4,90.203 ccw(c311.703,90.203) 311.703,87.9
NetR6_2: R6.2 U5.17 | length 6.7
  Top Layer w0.3: U5.17@331.5,91.2 R6.2@334.3,91.2 ; U5.17@332.269,91.2 ccw(c332.269,93.431) R6.2@333.846,91.854 ; U5.17@332.427,91.023 cw(c332.854,90.596) 332.854,91.2 cw(c332.854,91.804) U5.17@332.427,91.377 ; 332.993,91.2 ccw(c332.993,92.707) R6.2@334.059,91.641
NetR8_2: R8.2 R12.1 U3.5
NetR11_2: R11.2 R15.1 U3.3
NRST: C16.2 P1.2 R4.2 S0.2 U1.7 | length 49.2
  Top Layer w0.3: U1.7 349.95,111.05 350.45,111.05 351.4,112 351.4,114.6 v1(352.2,115.4) ; v1@352.05,115.4 cw(c351.688,115.4) 351.944,115.144 cw(c352.2,114.888) v1@352.2,115.25
  Top Layer w0.5: S0.2@367.196,103.446 ccw(c366.343,102.593) 366.343,103.8 ccw(c366.343,105.007) S0.2@367.196,104.154 ; S0.2 v1(364.9,103.8) 364,102.9 364,99 364.5,98.5 370.36,98.5 P1.2
  Bottom Layer w0.5: v1(352.2,115.4) 364.3,115.4 364.9,114.8 v1(364.9,103.8)
PA8: U1.11
PA11_CANRX: U1.32 U4.4 | length 21
  Top Layer w0.3: U4.4 323.795,116.505 330.25,110.05 U1.32 ; U4.4@323.6,116.355 cw(c323.6,115.522) 324.189,116.111
PA12_CANTX: U1.33 U4.1 | length 19.5
  Top Layer w0.3: U4.1 326.805,112.695 329.95,109.55 U1.33 ; U4.1@323.706,112.589 cw(c323.962,112.333) 323.962,112.695 cw(c323.962,113.057) U4.1@323.706,112.801
PA13_SWDIO: P1.3 R17.2 U1.34 | length 56.1
  Top Layer w0.3: v1@340.294,98.094 ccw(c340.038,97.838) 340.038,98.2 ccw(c340.038,98.562) v1@340.294,98.306 ; v1(340.4,98.2) 338.9,98.2 338.3,98.8 338.3,108.8 338.55,109.05 U1.34 ; v1@345.6,97.95 cw(c345.6,96.381) 346.71,97.49 ; v1(345.6,98.1) 345.7,98.2 346,98.2 350.6,93.6 367.1,93.6 R17.2 ; v1@345.6,98.25 cw(c345.6,97.405) 346.197,98.003 ; 367.576,94.076 ccw(c366.551,95.1) R17.2@368,95.1 ; 367.817,94.317 cw(c368.5,93.634) R17.2@368.5,94.6 ; R17.2@368.088,94.588 ccw(c367.576,95.1) R17.2@368.3,95.1
  Top Layer w0.8: R17.2 cw(c368.62,95.1) 368.62,95.12 P1.3 ; R17.2@368.877,94.923 cw(c369.352,94.448) 369.352,95.12 ; P1.3@370.953,94.873 ccw(c370.355,94.275) 370.355,95.12 ccw(c370.355,95.965) P1.3@370.953,95.367
  Bottom Layer w0.3: v1(340.4,98.2) 345.7,98.2 v1(345.6,98.1) ; v1@340.506,98.094 cw(c340.762,97.838) 340.762,98.2 cw(c340.762,98.562) v1@340.506,98.306 ; 344.996,98.2 cw(c344.996,97.496) v1@345.494,97.994
PA14_SWDCLK: P1.4 U1.37 | length 46.2
  Top Layer w0.3: v1(341.3,97) 341.75,97.45 U1.37 ; v1@341.3,97.15 ccw(c341.3,97.512) 341.556,97.256 ccw(c341.812,97) v1@341.45,97 ; v1@345.6,96.85 cw(c345.6,96.488) 345.856,96.744 cw(c346.112,97) v1@345.75,97 ; v1(345.6,97) 350.02,92.58 P1.4 ; P1.4@370.776,92.156 ccw(c369.751,91.131) 369.751,92.58 ccw(c369.751,94.029) P1.4@370.776,93.004
  Bottom Layer w0.3: v1(341.3,97) v1(345.6,97) ; v1@341.406,96.894 cw(c341.662,96.638) 341.662,97 cw(c341.662,97.362) v1@341.406,97.106 ; v1@345.494,96.894 ccw(c345.238,96.638) 345.238,97 ccw(c345.238,97.362) v1@345.494,97.106
RF_CE: U1.43 U7.2 | length 21.6
  Top Layer w0.3: U7.2 v1(341.4,94.5) ; U7.2@340.727,94.323 cw(c341.154,93.896) 341.154,94.5 cw(c341.154,95.104) U7.2@340.727,94.677 ; v1@341.294,94.394 ccw(c341.038,94.138) 341.038,94.5 ccw(c341.038,94.862) v1@341.294,94.606 ; U1.43@344.75,107.2 344.75,95.05 v1(345.3,94.5) ; v1@345.15,94.5 ccw(c344.788,94.5) 345.044,94.756 ccw(c345.3,95.012) v1@345.3,94.65
  Bottom Layer w0.3: v1@341.506,94.394 cw(c341.762,94.138) 341.762,94.5 cw(c341.762,94.862) v1@341.506,94.606 ; v1@341.6,94.5 v1(345.3,94.5) ; v1@345.194,94.394 ccw(c344.938,94.138) 344.938,94.5 ccw(c344.938,94.862) v1@345.194,94.606
RF_INT: U1.42 U7.7 | length 23.4
  Top Layer w0.3: U7.7 342.5,88.2 344.25,89.95 U1.42@344.25,107.1 ; U7.7@340.727,88.023 cw(c341.154,87.596) 341.154,88.2 cw(c341.154,88.804) U7.7@340.727,88.377
SF: U1.20 U6.13 | length 11.7
  Top Layer w0.3: v1(343.357,117.243) 343.75,116.85 U1.20
  Bottom Layer w0.3: v1@343.207,117.243 ccw(c342.845,117.243) 343.101,117.499 ccw(c343.357,117.755) v1@343.357,117.393 ; v1(343.357,117.243) 342.8,117.8 342.8,123.9 343.2,124.3 v1(343.8,124.3) ; v1@343.694,124.194 ccw(c343.438,123.938) 343.438,124.3 ccw(c343.438,124.662) v1@343.694,124.406
SPI1_MISO: U1.40 U7.6 | length 23.3
  Top Layer w0.3: U7.6 v1(342.4,89.5) ; U7.6@340.727,89.323 cw(c341.154,88.896) 341.154,89.5 cw(c341.154,90.104) U7.6@340.727,89.677 ; v1@342.294,89.394 ccw(c342.038,89.138) 342.038,89.5 ccw(c342.038,89.862) v1@342.294,89.606 ; v1(342.9,91.6) 343.25,91.95 U1.40@343.25,107.1
  Bottom Layer w0.3: v1(342.4,89.5) 342.9,90 v1(342.9,91.6) ; v1@342.4,89.65 ccw(c342.4,90.012) 342.656,89.756 ccw(c342.912,89.5) v1@342.55,89.5 ; v1@342.794,91.494 cw(c342.538,91.238) 342.9,91.238 cw(c343.262,91.238) v1@343.006,91.494
SPI1_MOSI: U1.41 U7.5 | length 20.3
  Top Layer w0.3: U7.5@340.5,90.7 343.2,90.7 343.75,91.25 U1.41@343.75,107.1 ; U7.5@340.727,90.523 cw(c341.154,90.096) 341.154,90.7 cw(c341.154,91.304) U7.5@340.727,90.877
SPI1_NSS: U1.38 U7.3 | length 16
  Top Layer w0.3: U7.3@340.5,93.3 341.6,93.3 342.25,93.95 U1.38@342.25,107 ; U7.3@340.727,93.123 cw(c341.154,92.696) 341.154,93.3 cw(c341.154,93.904) U7.3@340.727,93.477
SPI1_SCK: U1.39 U7.4 | length 17.8
  Top Layer w0.3: U7.4@340.5,92 342.1,92 342.75,92.65 U1.39@342.75,107 ; U7.4@340.727,91.823 cw(c341.154,91.396) 341.154,92 cw(c341.154,92.604) U7.4@340.727,92.177
SPI2_MISO: J3.7 U1.27 | length 23.8
  Top Layer w0.3: v1@333.962,113.46 ccw(c334.293,113.316) 334.038,113.062 ; v1(334.1,113.4) 334.1,113 334.55,112.55 U1.27 ; v1@334.238,113.34 ccw(c334.728,113.128) 334.35,112.75
  Bottom Layer w0.3: v1@333.994,113.294 cw(c333.738,113.038) 334.1,113.038 cw(c334.462,113.038) v1@334.206,113.294 ; v1(334.1,113.4) 334.1,102.9 334.428,102.572 J3.7 ; J3.7@336.152,102.324 ccw(c335.554,101.727) 335.554,102.572 ccw(c335.554,103.417) J3.7@336.152,102.819
SPI2_MOSI: J3.2 U1.28 | length 16.4
  Top Layer w0.3: v1@333.194,114.194 cw(c332.938,113.938) 333.3,113.938 cw(c333.662,113.938) v1@333.406,114.194 ; v1(333.3,114.3) 333.3,113 334.25,112.05 U1.28
  Bottom Layer w0.3: v1@333.3,114.4 334,115.1 337.163,115.1 J3.2 ; v1@333.45,114.3 cw(c334.054,114.3) 333.627,114.727 ; 334.984,115.1 ccw(c334.984,116.751) J3.2@336.152,115.583 ; 335.709,115.1 ccw(c335.709,116.026) J3.2@336.364,115.371
SPI2_NSS: J3.1 U1.25 | length 13.5
  Top Layer w0.3: v1@334.794,115.894 cw(c334.538,115.638) 334.9,115.638 cw(c335.262,115.638) v1@335.006,115.894 ; v1(334.9,116) 334.9,115.4 336.75,113.55 U1.25
  Bottom Layer w0.3: v1@334.794,116.106 ccw(c334.538,116.362) 334.9,116.362 ccw(c335.262,116.362) v1@335.006,116.106 ; v1(334.9,116) 334.9,117.5 335.2,117.8 J3.1 ; J3.1@336.153,117.553 ccw(c335.555,116.955) 335.555,117.8 ccw(c335.555,118.645) J3.1@336.153,118.047
SPI2_SCK: J3.5 U1.26 | length 17.2
  Top Layer w0.3: v1@334.9,113.95 cw(c334.9,113.588) 335.156,113.844 cw(c335.412,114.1) v1@335.05,114.1 ; v1(334.9,114.1) 335.95,113.05 U1.26
  Bottom Layer w0.3: v1@334.794,113.994 cw(c334.538,113.738) 334.9,113.738 cw(c335.262,113.738) v1@335.006,113.994 ; v1(334.9,114.1) 334.9,108 335.248,107.652 J3.5 ; J3.5@336.152,107.404 ccw(c335.554,106.807) 335.554,107.652 ccw(c335.554,108.497) J3.5@336.152,107.899
USART1_RX: U1.31 U5.20 | length 26
  Top Layer w0.3: v1@331.294,110.694 ccw(c331.641,111.041) 331.641,110.55 ; v1(331.4,110.8) 331.65,110.55 U1.31 ; v1@331.506,110.906 ccw(c332.366,111.766) 332.366,110.55
  Bottom Layer w0.3: v1@331.294,96.506 ccw(c331.038,96.762) 331.4,96.762 ccw(c331.762,96.762) v1@331.506,96.506 ; v1@331.294,110.694 cw(c331.038,110.438) 331.4,110.438 cw(c331.762,110.438) v1@331.506,110.694 ; v1(331.4,96.4) v1(331.4,110.8)
USART1_TX: U1.30 U5.21 | length 24.4
  Top Layer w0.3: v1@332.294,111.194 ccw(c332.641,111.541) 332.641,111.05 ; v1(332.4,111.3) 332.65,111.05 U1.30 ; v1@332.506,111.406 ccw(c333.366,112.266) 333.366,111.05
  Bottom Layer w0.3: v1@332.294,97.606 ccw(c332.038,97.862) 332.4,97.862 ccw(c332.762,97.862) v1@332.506,97.606 ; v1@332.294,111.194 cw(c332.038,110.938) 332.4,110.938 cw(c332.762,110.938) v1@332.506,111.194 ; v1(332.4,97.5) v1(332.4,111.3)
USART2_RX: U1.13 UART.2 | length 31.6
  Top Layer w0.3: U1.13 347.25,115.85 v1(348,116.6) ; U1.13@347.25,115.6 cw(c347.854,115.6) 347.427,116.027 ; v1@347.85,116.6 cw(c347.488,116.6) 347.744,116.344 cw(c348,116.088) v1@348,116.45
  Bottom Layer w0.3: v1(348,116.6) 353.86,122.46 UART.2 ; v1@348,116.75 ccw(c348,117.112) 348.256,116.856 ccw(c348.512,116.6) v1@348.15,116.6 ; UART.2@370.776,122.036 ccw(c369.751,121.011) 369.751,122.46 ccw(c369.751,123.909) UART.2@370.776,122.884
USART2_TX: U1.12 UART.3 | length 29.7
  Top Layer w0.3: v1@349.194,116.494 cw(c348.938,116.238) 349.3,116.238 cw(c349.662,116.238) v1@349.406,116.494 ; U1.12@349.3,113.6 v1(349.3,116.6)
  Bottom Layer w0.3: v1(349.3,116.6) 352.62,119.92 UART.3 ; v1@349.3,116.75 ccw(c349.3,117.112) 349.556,116.856 ccw(c349.812,116.6) v1@349.45,116.6 ; UART.3@370.776,119.496 ccw(c369.751,118.471) 369.751,119.92 ccw(c369.751,121.369) UART.3@370.776,120.344
V3.3: C1.2 C3.1 C4.2 C5.1 C6.2 C11.2 C14.1 C15.1 C18.1 C19.1 C20.1 C21.1 C22.1 C23.1 C24.1 C31.1 C32.1 D0.1 D1.1 J3.4 L2.1 P1.1 R4.1 R17.1 U1.24 U1.36 U1.48 U2.2 U2.4 U4.3 U5.23 U6.6 U6.7 U7.1@339.7,95.8 U8.5 U9.5 UART.1 | length 219.4
  Top Layer w0.3: v1@320.85,117.694 cw(c321.414,117.716) C1.2@321.015,118.115 ; v1@320.894,117.594 cw(c320.638,117.338) 321,117.338 cw(c321.362,117.338) v1@321.106,117.594 ; 321,116.086 cw(c323.914,116.086) C1.2@321.854,118.146 ; 321,116.81 cw(c323.19,116.81) C1.2@321.641,118.359 ; v1@321,117.534 cw(c322.466,117.534) C1.2@321.429,118.571 ; v1@321.15,117.706 cw(c322.347,117.753) C1.2 321,118.1 321,115.6 321.365,115.235 U4.3 ; U4.3@321.894,115.129 ccw(c321.638,114.873) 321.638,115.235 ccw(c321.638,115.597) U4.3@321.894,115.341 ; U8.5@339.362,122.813 ccw(c339.148,123.027) 339.45,123.027 ccw(c339.752,123.027) U8.5@339.538,122.813 ; U8.5@339.45,122.248 cw(c341.852,122.248) C24.1@340.154,123.946 ; U8.5 C24.1@339.45,124.05 ; U8.5@339.45,122.972 cw(c341.128,122.972) C24.1@339.941,124.159 ; C24.1@339.45,123.696 cw(c340.404,123.696) C24.1@339.729,124.371 ; U8.5@339.538,122.363 ccw(c340.174,122.999) v1@340.174,122.1 ; U8.5@339.625,122.1 v1(340.3,122.1) ; v1@340.194,121.994 ccw(c339.938,121.738) 339.938,122.1 ccw(c339.938,122.462) v1@340.194,122.206 ; v1@340.494,107.006 ccw(c340.238,107.262) 340.6,107.262 ccw(c340.962,107.262) v1@340.706,107.006 ; v1(340.5,114.7) 340.65,114.85 U1.24 ; v1(340.6,106.9) 340.6,107.9 U1.36 cw(c340.088,107.688) 340.6,107.688 ; v1@340.606,114.594 cw(c341.224,113.976) 341.224,114.85 ; U1.48 348.45,106.75 v1(348.5,106.7) ; 348.017,106.75 cw(c348.017,106.217) v1@348.394,106.594 ; U6.6 348.3,121.5 351.1,124.3 C4.2 ; U6.6@348.3,121.7 ccw(c348.3,122.183) 348.641,121.841 ; U6.7 U6.7@349.1,122.4 ; U6.7@349.4,122.4 cw(c349.883,122.4) 349.541,122.741 ; 349.964,123.164 cw(c351.5,121.627) C4.2@351.5,123.8 ; 350.476,123.676 cw(c351.5,122.651) C4.2@351.5,124.1
  Top Layer w0.5: C6.2@328.332,107.997 ccw(c327.788,108.6) 328.6,108.6 ; C6.2 v1(328.6,108.2) 328.6,108.6 ; C6.2@328.65,108.201 cw(c329.675,108.225) 328.95,108.95 ; C6.2@328.868,107.997 cw(c329.412,108.6) 328.6,108.6 ; U5.23@331.1,99.8 335.7,99.8 336.1,99.4 336.1,96.4 336.7,95.8 v1(338.8,95.8) v1(339.7,95.8) ; U5.23@332.356,99.594 cw(c332.854,99.096) 332.854,99.8 ; 333.446,108.554 cw(c332.593,107.7) C11.2@333.8,107.7 ; C11.2@333.688,108.312 ccw(c334.2,108.824) C11.2@334.2,108.1 ; C11.2 333.05,108.95 328.95,108.95 ; 328.6,108.6 328.95,108.95
  Top Layer w0.8: C5.1@327.161,103.261 cw(c326.222,102.322) 327.55,102.322 cw(c328.878,102.322) C5.1@327.939,103.261 ; C5.1 327.55,100.65 328.5,99.7 U5.23 ; C11.2 C18.1@336.8,107.7 ; 335.785,107.7 cw(c335.785,106.485) C18.1@336.644,107.344
  Bottom Layer w0.3: v1@340.194,121.994 cw(c339.455,121.255) 340.5,121.255 ; v1(340.3,122.1) 340.5,121.9 v1(340.5,114.7) ; v1@340.394,114.806 ccw(c340.138,115.062) 340.5,115.062 ccw(c340.862,115.062) v1@340.606,114.806
  Bottom Layer w0.5: v1(321,117.7) v1(325.6,117.7) ; v1(328.6,108.2) 328.6,116.2 327.1,117.7 v1(325.6,117.7) ; v1(333.7,122) 326,122 325.6,121.6 v1(325.6,117.7) ; v1(339.7,95.8) 361.9,95.8 363.4,97.3 v1(368.6,97.3) ; v2(358.8,124.5) 359.3,125 UART.1 ; UART.1@370.846,124.646 ccw(c369.993,123.793) 369.993,125 ccw(c369.993,126.207) UART.1@370.846,125.354
  Bottom Layer w0.8: J3.4 340.592,110.192 ; v1@340.6,107 cw(c340.6,105.31) 341.795,106.505 ; 340.6,108.055 cw(c341.545,108.055) C20.1@340.877,108.723 ; 340.6,109.945 ccw(c341.545,109.945) C20.1@340.877,109.277 ; 340.6,114.1 340.6,107.7 341.6,106.7 ; 340.85,114.35 341.1,114.6 C19.1 ; 342.868,106.7 cw(c342.868,105.451) C22.1@343.995,105.989 ; C22.1@343.273,105.644 ccw(c341.6,104.846) 341.6,106.7 ; C22.1@343.29,106.11 cw(c344.715,104.685) 344.715,106.7 ; C22.1@343.856,105.544 cw(c346.647,102.753) C21.1@346.647,106.7 ; 344.872,106.7 ccw(c344.872,108.328) C21.1@346.023,107.177 ; C21.1@346.577,107.177 ccw(c347.728,108.328) 347.728,106.7 ; v2(360.1,111.5) v2(358.8,111.5) 350.1,111.5 349.3,110.7 349.3,107.5 v1(348.5,106.7) 341.6,106.7
  Bottom Layer w1: v1(368.6,97.3) 368.6,99.4 ; v2(368.6,110.6) 368.6,99.4 ; P1.1 369.4,100.2 368.6,99.4
V5: C2.1 C25.1 C26.1 C29.2 L1.2 P3.2 P4.2 R8.1 R10.1 U2.3 | length 90.5
  Top Layer w1: P4.2 318.5,118.8 320,120.3 320,124.7 321.3,126 ; 316.055,118.8 ccw(c316.055,119.845) C2.1@316.794,119.106 ; C2.1@317.206,119.106 ccw(c317.945,119.845) 317.945,118.8 ; 321.67,126 cw(c321.67,121.67) C25.1@324.732,124.732 ; C29.2@322.575,125.317 ccw(c321.3,124.468) 321.3,126 ; C29.2@323.006,125.294 cw(c324.711,123.589) C25.1@324.711,126 ; C29.2@323.167,126 cw(c323.167,125.711) C29.2@323.408,125.871 ; 324.084,126 cw(c324.084,124.084) C25.1@325.439,125.439 ; C25.1@326.161,125.439 cw(c327.516,124.084) 327.516,126 ; C25.1@326.868,124.732 cw(c329.93,121.67) 329.93,126 ; 336.655,126 cw(c336.655,124.955) R10.1@337.394,125.694 ; R10.1@337.806,125.694 cw(c338.545,124.955) 338.545,126 ; 364.076,126 cw(c364.076,125.076) C26.1@364.729,125.729 ; C26.1 364.6,126 351.2,126 321.3,126
  Bottom Layer w0.8: v2(312.5,105.1) v2(312.5,118.8)
  Bottom Layer w1: v1(351.2,126.2) v1(351.2,128.8)
VBAT: BT1.1 U1.1 U5.22 | length 54.1
  Top Layer w0.3: U5.22 v2(334.5,98.6) ; U5.22@332.427,98.423 cw(c332.854,97.996) 332.854,98.6 cw(c332.854,99.204) U5.22@332.427,98.777 ; v2@334.323,98.423 ccw(c333.896,97.996) 333.896,98.6 ccw(c333.896,99.204) v2@334.323,98.777 ; U1.1 349.55,108.05 349.8,107.8 v1(349.8,105.9) ; U1.1@349.3,108.05 cw(c349.3,107.446) 349.727,107.873 ; v1@349.694,106.006 ccw(c349.438,106.262) 349.8,106.262 ccw(c350.162,106.262) v1@349.906,106.006
  Bottom Layer w0.3: v2(334.5,98.6) 335,99.1 349.3,99.1 349.8,99.6 v1(349.8,105.9) 353.9,105.9 BT1.1@355.519,104.281 ; v1@349.694,105.794 cw(c349.438,105.538) 349.8,105.538 cw(c350.162,105.538) 349.906,105.794 cw(c350.162,105.538) 350.162,105.9 cw(c350.162,106.262) v1@349.906,106.006 ; v1@349.939,105.9 cw(c349.939,100.576) BT1.1@353.704,104.341 ; 350.663,105.9 cw(c350.663,101.301) BT1.1@353.916,104.553 ; 351.388,105.9 cw(c351.388,102.025) BT1.1@354.128,104.765 ; 352.112,105.9 cw(c352.112,102.749) BT1.1@354.34,104.977 ; 352.836,105.9 cw(c352.836,103.473) BT1.1@354.552,105.189
VCC: C30.1 C35.1 D4.2 R9.1 R11.1 U3.2 | length 14.1
  Bottom Layer w0.3: v1@329.194,124.406 ccw(c328.938,124.662) 329.3,124.662 ccw(c329.662,124.662) v1@329.406,124.406 ; v1@329.194,137.194 cw(c328.938,136.938) 329.3,136.938 cw(c329.662,136.938) v1@329.406,137.194 ; v1(329.3,124.3) v1(329.3,137.3)
pads on no net: BT1.0 J3.8 J3.9 J3.10 J3.11 U1.2 U1.10 U4.5 U5.1 U5.2 U5.4 U5.5 U5.6 U5.7 U5.8 U5.9 U5.14 U5.15 U5.16 U5.18 U5.19 U6.1 U6.8 U6.9 U6.11 U6.12 U6.14 U7.0 U7.1@354.4,85.2
copper on no net: | length 24.8
  Top Layer w0.254: 370.1,127.2 370.1,136.8 372.9,136.8 372.9,127.2 370.1,127.2

## Polygon pours and split planes (outlines as drawn)
GND on Bottom Layer "Bottom Overlay-No Net" (hatched 45Degree grid 0.508 track 0.203, remove dead copper): 373.2,141.9 305.1,141.9 305.1,84 373.2,84
GND on Top Layer "Bottom Overlay-No Net" (hatched 45Degree grid 0.508 track 0.203, remove dead copper): 373.2,141.9 305.1,141.9 305.1,84 373.2,84

## Keep-outs
Keep-Out Layer:
  lines w0.254: 305.1,85.27 ccw(c306.37,85.27) 306.37,84 371.93,84 ccw(c371.93,85.27) 373.2,85.27 373.2,140.63 ccw(c371.93,140.63) 371.93,141.9 309.2,141.9 306.37,141.9 ccw(c306.37,140.63) 305.1,140.63 305.1,85.27

## Other copper
Top Layer:
  rectangle net GND: 366.9,114.5 369.7,133
  rectangle net GND: 354.2,131.3 369.7,133
  rectangle net GND: 321.2,86.6 329.3,98.6
  rectangle net GND: 339.8,99.9 341,103.6
  rectangle net GND: 317,108.8 318,113
  rectangle net GND: 341.8,108.1 347.2,113.5
  rectangle net NetD1_2: 327.5,116.9 330.5,118.3
  rectangle net GND: 322.8,118.4 324,121.2
  rectangle net GND: 312,106.4 318,109.7
  rectangle net GND: 307.9,106.4 313.3,107.6
  rectangle net GND: 308.8,120.2 313.2,121.4
  rectangle net GND: 305.9,95.3 310.9,127.3
  rectangle net GND: 330.6,103.5 337.6,106.4
  rectangle net V3.3: 328,105.4 328.5,108.3
  rectangle net GND: 330.5,105.7 331.1,108.3
  rectangle net GND: 360.2,99.7 361.9,105.3
  rectangle net GND: 358.7,105 371.4,105.9
  rectangle net GND: 356.3,109 360.2,110.5
  rectangle net GND: 358.6,103.1 360.2,110.5
  rectangle net GND: 335.1,118.9 337.6,119.8
  rectangle net GND: 370.5,112.4 371.9,118.1
  rectangle net GND: 340.1,118.5 340.7,119.7
  rectangle net GND: 336.9,118.5 340.7,119
  rectangle net ADC_5V: 337,120.4 339.7,120.8
  rectangle net V3.3: 351.6,124.3 359.1,124.9
  rectangle net GND: 305.9,127.1 313.8,134.5
  rectangle net NetF1_1: 318.2,138 324.8,139.9
  rectangle net NetF1_1: 318.2,132.3 320.2,139.9
  rectangle net GND: 354.2,127.3 356.5,131
  rectangle net GND: 342.9,127.3 345.9,129.5
  rectangle net GND: 338.8,127.2 356.5,128
  rectangle net NetR8_2: 346.7,129.2 347.8,132.4
  rectangle net NetC27_2: 342.8,135.6 343.6,139.4
  rectangle net GND: 313.2,120.3 317.7,121.4
  rectangle net V3.3: 332.3,121.7 335.9,122.2
  rectangle net GND: 322.1,120.2 324.5,122.1
  rectangle net GND: 322.1,120.2 323.5,123.1
  rectangle net GND: 325.9,120.8 331.3,121.2
  rectangle net ADC_12V: 330.6,121.7 331.4,123.3
  rectangle net ADC_5V: 336.9,121.2 338.3,124.2
  rectangle net ADC12_IN9: 330.3,119.8 333.5,120.3
  rectangle net ADC_12V: 330.8,123.2 333.8,124.6
  rectangle net V3.3: 366.6,99.6 371.7,100.9
  rectangle net NRST: 362.6,99.6 365.5,101
  rectangle net GND: 356.3,103.1 360.1,104.6
  rectangle net GND: 356.2,101.6 357.6,104.4
  rectangle net GND: 356.2,109.8 357.6,112.6
  rectangle net NetD0_2: 369.3,106.7 372.1,107.9
  rectangle net V3.3: 367,106.6 368.2,111.9
  rectangle net V3.3: 363.3,106.5 368.2,108
  rectangle net V3.3: 367.2,109.7 371.3,111.9
  rectangle net GND: 364.3,112.4 371.4,114.7
  rectangle net AGND: 353.7,118.1 357.6,119.3
  rectangle net NetC36_1: 353.4,120.1 355.1,121.9
  rectangle net NetC36_1: 350.9,120.1 355.1,120.6
  rectangle net AGND: 351.1,118 354.9,118.8
  rectangle net NetC36_1: 353.4,122.3 357.6,123.7
  rectangle net V3.3: 356.3,120.4 359,121.7
  rectangle net V3.3: 358.3,111 359.2,124.9
  rectangle net V3.3: 358.3,111 363,112
  rectangle net V5: 359.8,114.2 360.8,126.4
  rectangle net V3.3: 362.1,107.5 363.1,114
  rectangle net GND: 364.3,114.2 365.4,116.9
  rectangle net GND: 311.9,127.2 334,129.2
  rectangle net V5: 361.2,126.3 364.5,128.7
  rectangle net V5: 364.2,126.5 365.4,130.2
  rectangle net NetC27_1: 354.3,134.3 356.5,139.8
  rectangle net NetC27_1: 345,138.6 364.9,140.6
  rectangle net NetC27_1: 346.1,135.6 348.3,139.3
  rectangle net GND: 346.9,134.3 351,135
  rectangle net NetC28_1: 346.9,133 351,133.7
  rectangle net GND: 349.6,134.5 350.8,137.5
  rectangle net NetC28_2: 351.6,134.9 352.7,137.5
  rectangle net NetC28_1: 349.7,132.4 352.9,133.6
  rectangle net NetR8_2: 346.8,128.5 349.8,129.9
  rectangle net GND: 342.9,128.5 345.8,129.9
  rectangle net NetC34_1: 341,128.6 342.2,132.5
  rectangle net GND: 332.9,127.2 339.9,129.7
  rectangle net NetR11_2: 339.4,133 342.8,133.7
  rectangle net NetR11_2: 338.4,130.4 339.9,133.8
  rectangle net VCC: 338.4,134.3 343.1,135
  rectangle net VCC: 338.4,134.4 339.9,137.2
  rectangle net VCC: 325.9,136.7 339.9,139.9
  rectangle net NetD4_1: 321.5,132.2 328.1,134.6
  text "Apache" at 372,127.8 h1.5 r90
Bottom Layer:
  rectangle net GND: 321.2,86.6 329.3,98.6
  rectangle net GND: 339.9,102.1 346.6,103.1
  rectangle net V3.3: 345.3,104.2 346.7,106.7
  rectangle net V3.3: 338.3,93.1 339.9,96.2
  rectangle net GND: 335.7,86.6 339.7,92.3
  rectangle net V3.3: 335.7,93 339.7,94.2
  rectangle net GND: 341.8,108.1 347.2,113.5
  rectangle net GND: 343.5,121.5 348.8,122.8

## Silkscreen, mask and mechanical layers (free items; w line width, h text height)
Top Overlay:
  lines w0.254: 352.9,129.5 352.9,130.3
  text "30.1K" at 349.5,139.6 h1
  text "10uH" at 364.1,136.6 h1
  text "348K" at 337.5,136.5 h1
  text "220u" at 331.7,133.5 h1
  text "35V" at 332.1,132.2 h1
  text "54331" at 345.3,131.9 h1 r90
  text "22p" at 345.1,130.3 h1
  text "76.8K" at 334.2,128.6 h1
  text "562" at 352.6,128.2 h1
  text "10K" at 351,127 h1
  text "100K" at 327.9,126.5 h1
  text "20K" at 332.4,126.5 h1
  text "153" at 344.5,125.7 h1 r90
  text "1.87K" at 345.4,125.7 h1
  text "BEAD" at 356.1,125.5 h1
  text "CAN-MAIN" at 305.6,124.7 h1
  text "10K" at 336.4,122.1 h1
  text "470u" at 362.9,121.1 h1
  text "106" at 353,120 h1
  text "16V" at 363.5,119.8 h1
  text "0" at 358.1,119.5 h1 r270
  text "7361" at 343.4,118.6 h1 r90
  text "10K" at 336.7,115.6 h1
  text "330" at 331.1,115.5 h1
  text "VP230" at 320.9,112.3 h1 r90
  text "1117" at 362.3,111 h1
  text "STM32" at 341.6,104.6 h1
  text "47u" at 330.3,103.1 h1 r90
  text "6p" at 357.9,102.1 h1
  text "RST" at 367.3,101.6 h1
  text "CAN-AUX" at 305.6,96.4 h1
  text "1K" at 333.6,88.1 h1
  text "2401" at 342.4,86.1 h1
  text "GPS" at 311,85.7 h1
Bottom Overlay:
  drawing of 914 lines, arcs and shapes, not listed
  text "Harbin Institute of Technology" at 367.1,140 h1.5
  text "Racing Team" at 367.1,137.8 h1.5
  text "Vehicle Data Recorder Core Control V2.1" at 367.1,135.5 h1.5
  text "2013.5.10" at 332.9,133.5 h1
  text "SD Card" at 336.4,125.6 h1
  text "3.3" at 369.8,124.6 h1
  text "Rx" at 369.8,122 h1
  text "Tx" at 369.8,119.5 h1
  text "3.3nf" at 348.8,117.9 h1
  text "GND" at 369.9,116.9 h1
  text "104" at 345.2,113.3 h1 r270
  text "103" at 341.7,111.5 h1
  text "102" at 349,106.3 h1 r270
  text "106" at 344.6,103.6 h1
  text "3.3" at 371.9,101.4 h1
  text "101" at 345.7,99.6 h1 r270
  text "RST" at 369.4,96.6 h1 r270
  text "IO" at 369.3,94.4 h1 r270
  text "104" at 340.8,88.2 h1
  text "GND" at 372.2,88.2 h1
Top Solder:
  rectangle: 370,127.1 373,136.9

## Text inside footprints (layer, text, board x,y; h text height)
U5: Top Overlay "1" at 321.8,100.2 h1; Top Overlay "12" at 320.9,86.6 h1; Top Overlay "13" at 327.9,86.5 h1; Top Overlay "24" at 327.9,100.2 h1